# Altium PCB TS-4900 Yonder Parent.PcbDoc (part 2 of 2)
Units mil, origin at the board's own origin, x right, y up, seen from the top; angles counter-clockwise.
Board outline 3838 x 4094 mil, 4 copper layers (Component Side, Ground Plane, Power Plane, Solder Side), stack 33.234 mil thick; 152 components, 102 nets, 692 pads, 286 vias.
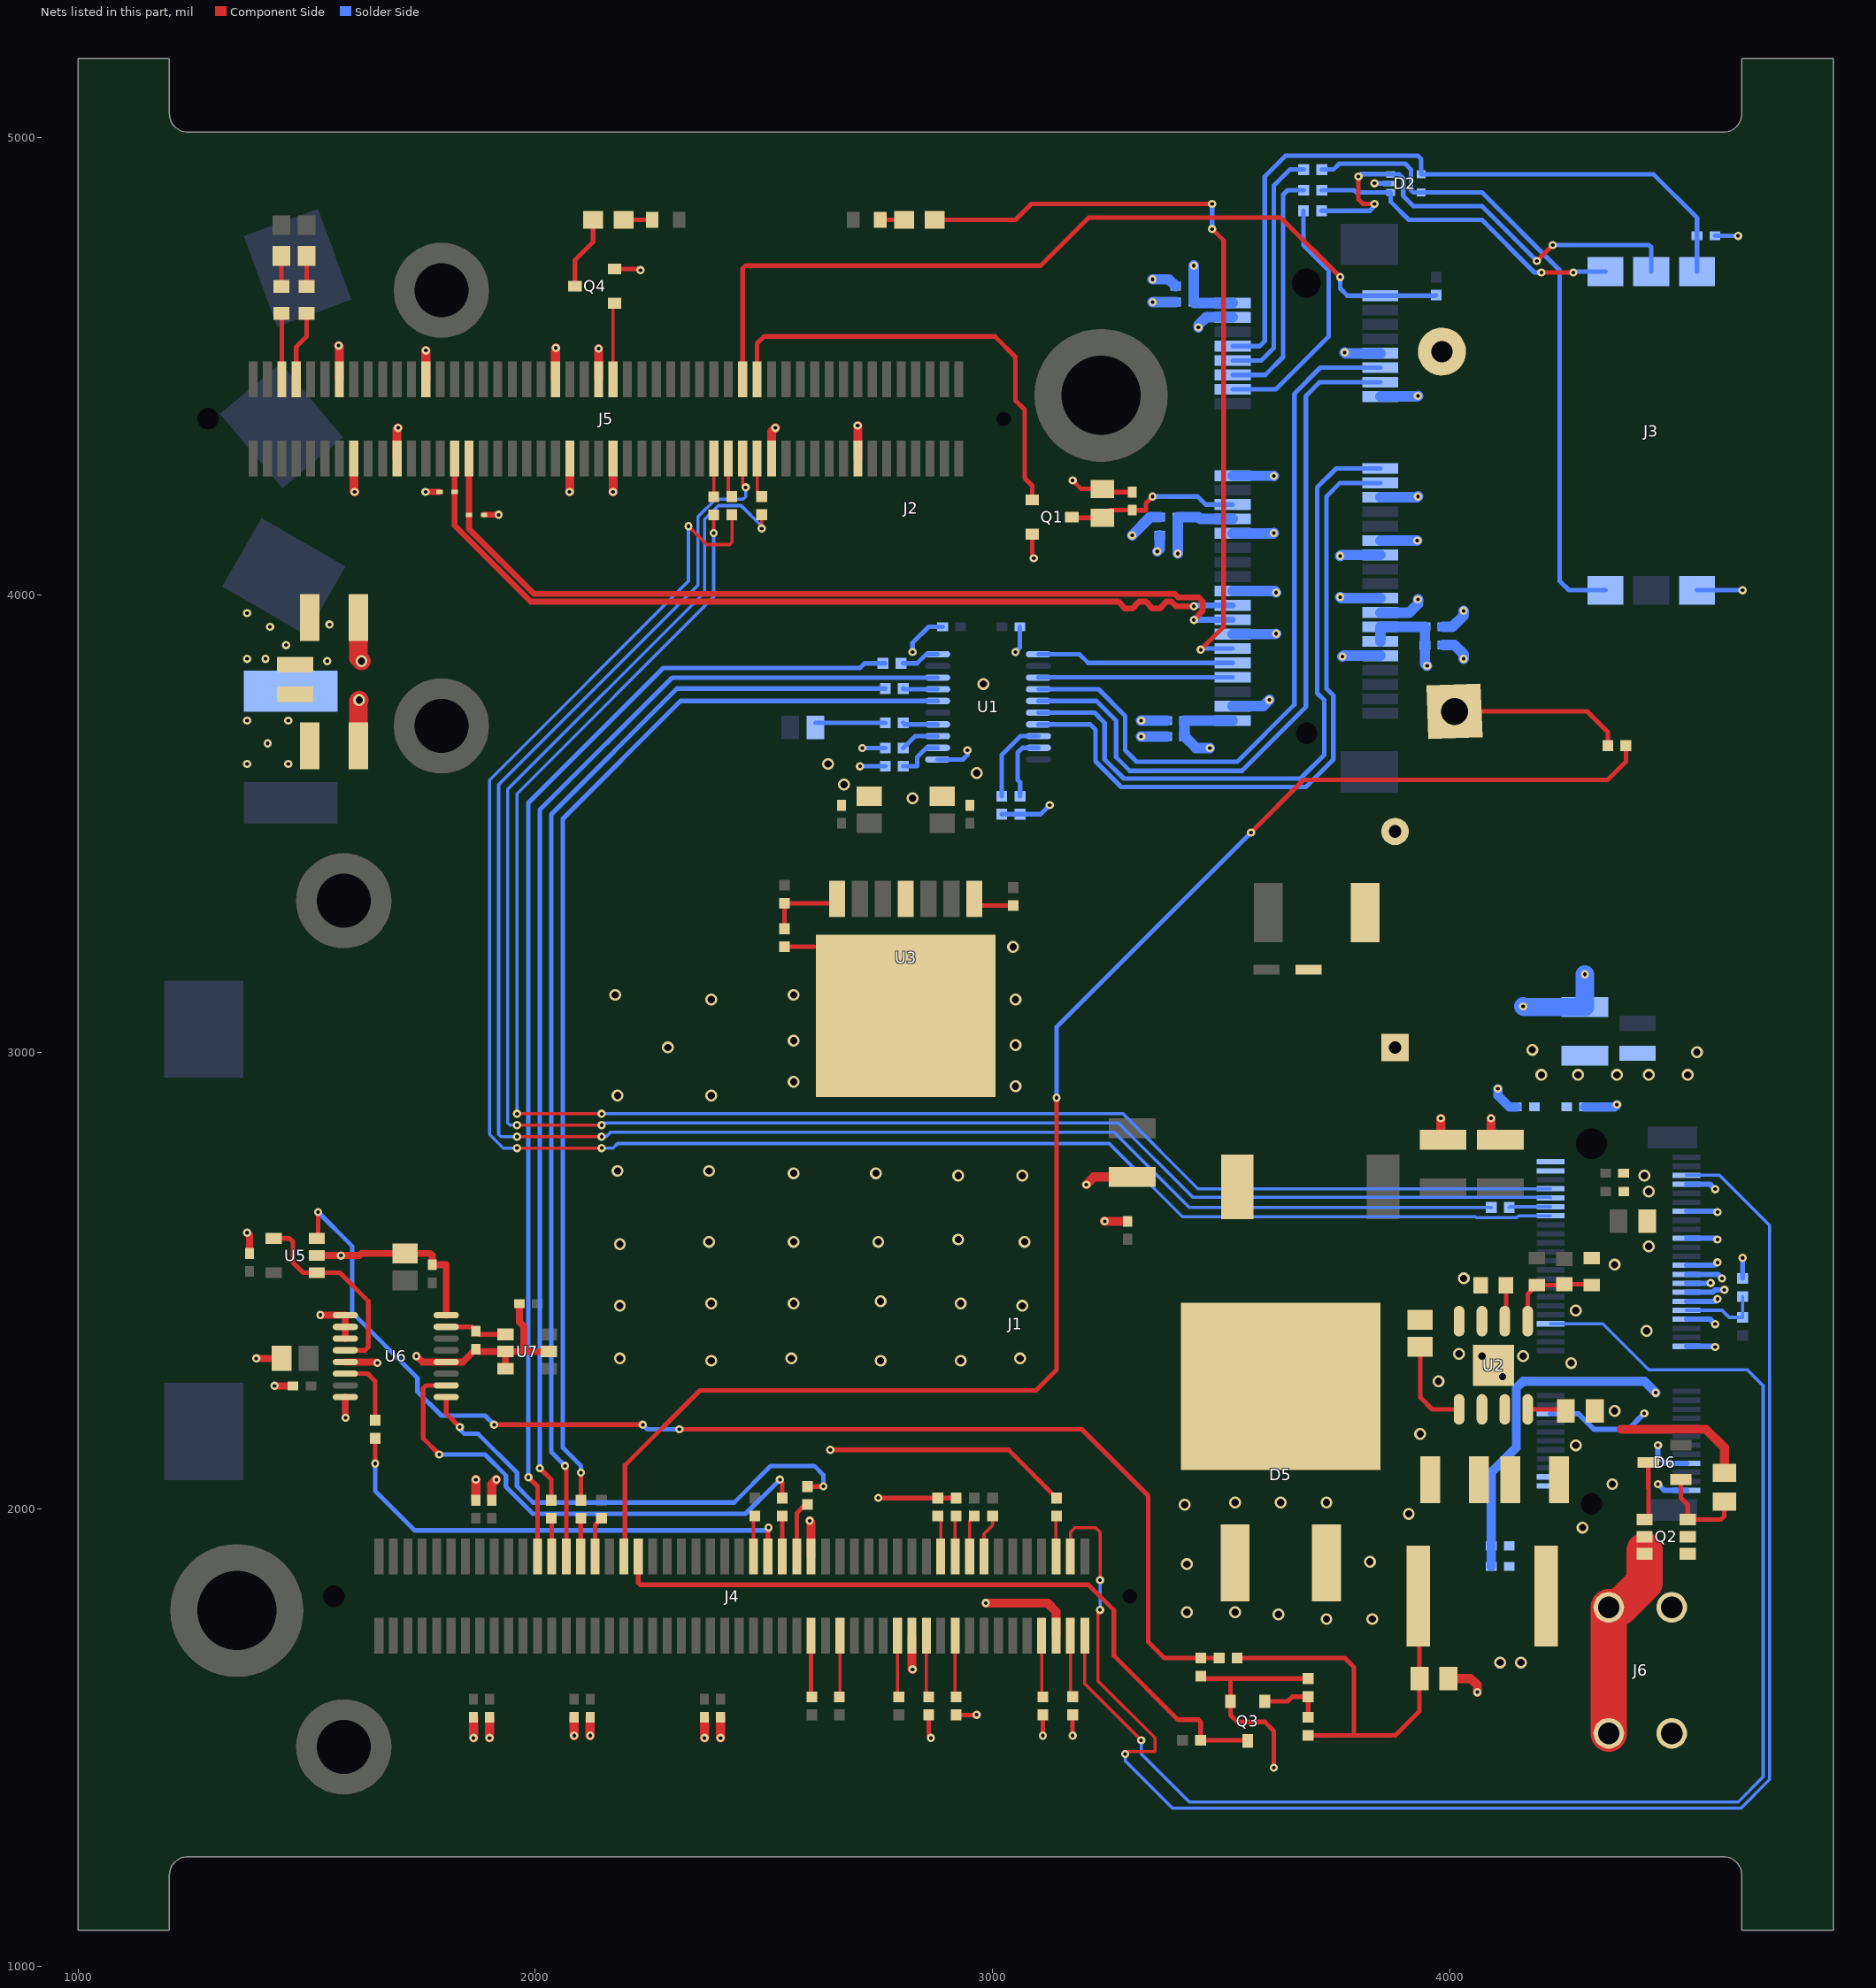
[diagram p4: the nets of this part, all layers, seen from the top]

## Via types
v1: diameter 18, hole 8, Component Side to Solder Side, 198 vias
v2: diameter 26, hole 16, Component Side to Solder Side, 88 vias

## Nets (pads, with @x,y where several pads share a name; then routed paths per layer and width w, separated by ;. In a path a pad name is that pad's centre, name@x,y a point inside that pad or via, vN(x,y) a via of type N, cw(c..) or ccw(c..) an arc to the next point about the centre after c; other vN are vias at no path point) (continued)
ADC_SPI_MISO: J4.56 R57.2 | length 1077.3
  Component Side w10: v1(1650,2100) R57.2@1650,2155.31 ; J4.56@2508.74,1896.61 2508.74,1958.74 v1(2510,1960)
  Solder Side w10: v1(1650,2100) 1650,2040 1736,1954 2504,1954 v1(2510,1960)
ADC_SPI_MOSI: R53.1 U6.2 | length 1099
  Component Side w10: v1(1790,2120) 1755,2155 1755,2265 1761.02,2271.02 U6.2@1805.24,2271.02 ; v1(2535,2065) 2540,2060 R53.1@2540,2024.68
  Solder Side w10: v1(1790,2120) 1889.7,2120 1936,2073.7 1936,2049 1995,1990 2460,1990 v1(2535,2065)
ADC_SPI_SLK: R54.1 U6.1 | length 1063.2
  Component Side w10: U6.1@1805.24,2245.43 1805.24,2209.76 v1(1835,2180) ; R54.1@2595,2049.68 2629.68,2049.68 v1(2630,2050)
  Solder Side w10: v1(1835,2180) 1835,2175 1845,2165 1875,2165 1960,2080 1960,2050 1995,2015 2435,2015 2515,2095 2610,2095 2630,2075 v1(2630,2050)
GND: BT1.2 C1.1 C2.2 C3.2 C4.2 C5.2 C6.2 C7.2 C8.2 C9.2 C10.2 C11.2 C12.2 C13.2 C14.2 C15.2 C16.1 C17.1 C18.2 C19.2 C20.1 C21.1 C23.1 C24.1 C26.1 C27.1 C28.2 C29.2 C30.2 C31.2 C32.2 C33.2 C34.2 C35.2 C36.2 C37.2 C38.2 C39.2 C40.2 C41.2 C42.2 C43.2 C44.2 C45.2 C46.2 C47.2 C48.2 C49.2 C50.2 D2.2 D3.1 D4.1 D5.1 D5.3 J1.1 J1.7 J1.18 J1.33 J1.39 J1.43 J1.45 J1.47 J1.49 J1.51 J1.57 J1.63 J1.69 J2.4 J2.9 J2.15 J2.18 J2.21 J2.26 J2.27 J2.29 J2.34 J2.35 J2.37 J2.40 J2.43 J2.50 J3.5 J4.62 J4.75 J4.95 J5.14 J5.15 J5.21 J5.26 J5.44 J5.45 J5.50 J5.51 J5.73 J5.85 J6.3 J6.4 Q1.2 Q3.2 Q4.2 R3.1 R10.1 R13.2 R14.1 R15.2 R16.1 R17.1 R19.1 R20.1 R21.1 R22.1 R25.1 R29.1 R42.1 R44.1 R45.2 R47.2 R49.2 R50.1 R51.2 R56.1 U1.11 U2.7 U2.9 U3.4 U3.TAB U5.2 U6.4 U6.8 U6.9 U6.10 U6.11 U6.13 U6.16 U7.2 U7.3 U7.5 | length 9837.5
  Component Side w10: Q4.2@2173.31,4712.4 2227.6,4712.4 v1(2230,4710) ; R25.1@2545,3230.32 2609.68,3230.32 ; v1(2645,2130) 2645.16,2129.84 3034.84,2129.84 R50.1@3140,2024.68 ; v1(2750,2025) 2749.68,2024.68 R42.1@2880,2024.68 R44.1@2920,2024.68 ; R45.2@2860,1550.31 2860,1505 v1(2865,1500) ; R47.2@2920,1550.31 2964.69,1550.31 v1(2965,1550.63) ; Q1.2@3086.69,4132.6 3086.69,4083.31 v1(3090,4080) ; v1(3110,1505) R49.2@3110,1550.31 ; v1(3175,1505) R51.2@3175,1550.63 ; v1(3175,4250) 3193.5,4231.5 R10.1@3240,4231.5 3246.81,4224.69 C7.2@3305,4224.69 ; R56.1@3455,1635.32 3460.63,1629.68 3520.2,1629.68 ; v1(3615,1435) 3615,1515 3595,1535 3535,1535 3520.2,1549.8 Q3.2@3520.2,1580 3520.2,1629.68 ; R29.1@3690,1629.68 3520.2,1629.68
  Component Side w13: v1(1760,4225) D4.1@1790.63,4225 ; D3.1@1888,4175 v1(1920,4175)
  Component Side w15: v1(1370,2605) 1375,2600 C47.2@1375,2559.69 ; v1(1390,2330) C45.2@1445.47,2330 ; v1(1430,2270) C46.2@1470.31,2270 ; U5.2@1522.24,2555 1615,2555 1619.53,2559.53 C49.2@1715,2559.53 1770.47,2559.53 1775,2555 C50.2@1775,2534.69 1775.08,2534.76 1805.24,2534.76 U6.8@1805.24,2424.57 ; v1(1530,2425) 1530.43,2424.57 U6.9@1584.76,2424.57 U6.10@1584.76,2398.98 U6.11@1584.76,2373.39 ; U6.16@1584.76,2245.43 1584.76,2200.24 v1(1585,2200) ; U6.13@1584.76,2322.2 1652.8,2322.2 v1(1655,2320) ; v1(1740,2335) 1752.8,2322.2 U6.4@1805.24,2322.2 1841.89,2322.2 C44.2@1870,2350.31 1875.32,2345 U7.2@1935,2345 ; U7.3@1935,2307.6 U7.2@1935,2345 ; C48.2@1965.31,2450 1965.31,2409.69 1975,2400 1975,2345 ; U7.5@2029.49,2345 1975,2345 ; U7.2@1935,2345 1975,2345
  Component Side w19.6: v1(1570,4545) 1571.73,4543.27 J5.14@1571.73,4471.42 ; J5.15@1603.23,4298.19 1603.23,4226.77 v1(1605,4225) ; J5.21@1697.72,4298.19 1697.72,4362.72 v1(1700,4365) ; J5.26@1760.71,4471.42 v1(1760.71,4534.29) ; J5.44@2044.17,4471.42 2044.17,4539.17 v1(2045,4540) ; v1(2075,4225) 2075.67,4225.67 J5.45@2075.67,4298.19 ; J5.50@2138.66,4471.42 v1(2138.66,4538.66) ; v1(2170,4225) 2170.16,4225.16 J5.51@2170.16,4298.19 ; J5.73@2516.61,4298.19 2516.61,4356.61 v1(2525,4365) ; v1(2600,1975) 2603.23,1971.77 J4.62@2603.23,1896.61 ; v1(2705,4370) 2705.59,4369.41 J5.85@2705.59,4298.19 ; J4.75@2823.7,1723.39 2823.7,1651.3 v1(2825,1650) ; v1(2985,1795) 3120,1795 3138.66,1776.34 J4.95@3138.66,1723.39
  Component Side w20: v1(1865,1500) C36.2@1865,1545.31 ; C43.2@1870,2019.69 v1(1870,2065) ; v1(1900,1500) C40.2@1900,1545.31 ; C39.2@1905,2019.69 1905,2055 v1(1915,2065) ; v1(2085,1505) C41.2@2085,1545.31 ; v1(2120,1505) C37.2@2120,1545.31 ; v1(2370,1500) C42.2@2370,1545.31 ; v1(2405,1500) C38.2@2405,1545.31 ; v1(3205,2710) 3221.85,2726.85 C24.1@3305,2726.85 ; v1(3245,2630) 3245.31,2629.69 C28.2@3295,2629.69 ; v1(3980,2855) 3980,2813.15 C27.1@3985,2808.15 ; R21.1@3996.5,1630 4045,1630 4060,1615 v1(4060,1600) ; v1(4090,2855) 4090,2828.15 C23.1@4110,2808.15 ; 4375,2175 4560,2175 4600,2135 R22.1@4600,2080
  Component Side w40: C16.1@1613.15,3670 1613.15,3768.15 v2(1615,3770) ; C17.1@1613.15,3950 1613.15,3861.85 v2(1620,3855)
  Solder Side w10: v1(2710,3625) R16.1@2765.32,3625 ; v1(2715,3665) R14.1@2765.32,3665 ; v1(2825,3875) 2825,3895 2860,3930 C11.2@2890.63,3930 ; U1.11@2879.76,3639.84 2934.84,3639.84 2945,3650 v1(2945,3660) ; R13.2@3020,3520.31 R15.2@3060,3520.31 3105.31,3520.31 v1(3125,3540) ; v1(3050,3875) 3059.69,3884.69 C10.2@3059.69,3930 ; v1(3835,4900) 3835.32,4899.69 D2.2@3867.05,4899.69 ; J3.5@4540,4010 v1(4640,4010) ; C6.2@4579.69,4785 v1(4630,4785) ; R3.1@4640,2504.68 v1(4640,2550)
  Solder Side w11.8: J1.18@4220,2208.82 4281.18,2208.82 4315,2175 4390,2175 v1(4425,2210) ; v1(4455,2055) 4468.5,2041.5 J1.1@4517.24,2041.5 ; v1(4455,2140) 4455,2116.1 4470.55,2100.55 J1.7@4517.24,2100.55 ; J1.33@4517.24,2356.46 4578.54,2356.46 v1(4580,2355) ; J1.39@4517.24,2415.51 4569.49,2415.51 v1(4580,2405) ; J1.43@4517.24,2454.88 4579.88,2454.88 v1(4585,2460) ; J1.45@4517.24,2474.57 4574.57,2474.57 4580,2480 v1(4600,2480) ; J1.47@4517.24,2494.25 4569.25,2494.25 v1(4570,2495) ; J1.49@4517.24,2513.94 4586.06,2513.94 v1(4595,2505) ; J1.51@4517.24,2533.62 4578.62,2533.62 v1(4585,2540) ; J1.57@4517.24,2592.68 4582.32,2592.68 v1(4585,2590) ; J1.63@4517.24,2651.73 4583.27,2651.73 v1(4585,2650) ; J1.69@4517.24,2710.79 4569.21,2710.79 v1(4580,2700)
  Solder Side w20: C4.2@4090.31,1875 C5.2@4090.31,1920 4090.31,2080.31 4145,2135 4145,2265 4160,2280 4425,2280 v1(4450,2255) ; v1(4105,2920) 4105,2905 4130,2880 C3.2@4145.31,2880 ; C2.2@4294.69,2880 4360,2880 v1(4365,2885)
  Solder Side w23: v1(3305,4130) 3345,4170 C14.2@3365.31,4170 ; v1(3325,3690) C18.2@3380.31,3690 ; v1(3325,3725) C19.2@3380.31,3725 ; v1(3350,4640) C9.2@3400.31,4640 ; v1(3350,4690) 3385.32,4690 C8.2@3400.31,4675 ; v1(3360,4095) 3365.31,4100.31 C15.2@3365.31,4130 ; v1(3450,4585) 3450,4590 3466.89,4606.89 J2.4@3525,4606.89 ; J2.50@3525,3756.5 3591.5,3756.5 v1(3605,3770) ; J2.40@3525,3913.98 3618.98,3913.98 v1(3620,3915) ; J2.34@3525,4008.46 3616.54,4008.46 v1(3620,4005) ; J2.26@3525,4134.45 3614.45,4134.45 v1(3615,4135) ; J2.18@3525,4260.43 3614.57,4260.43 v1(3615,4260) ; v1(3760,3995) 3762.28,3992.72 J2.35@3847.83,3992.72 ; v1(3760,4085) 3762.2,4087.2 J2.29@3847.83,4087.2 ; v1(3765,3865) 3766.73,3866.73 J2.43@3847.83,3866.73 ; v1(3770,4530) 3771.85,4528.15 J2.9@3847.83,4528.15 ; J2.37@3847.83,3961.22 3911.22,3961.22 3930,3980 v1(3930,3990) ; J2.27@3847.83,4118.7 v1(3928.7,4118.7) ; J2.21@3847.83,4213.19 3928.19,4213.19 v1(3930,4215) ; J2.15@3847.83,4433.66 3928.66,4433.66 v1(3930,4435) ; C12.2@3984.69,3890 4010,3890 4030,3870 v1(4030,3860) ; C13.2@3984.69,3930 4005,3930 4030,3955 v1(4030,3965)
  Solder Side w40: v1(4160,3100) 4161.85,3098.15 C1.1@4295,3098.15 v1(4295,3170)
  other v1: 1575,2555
  other v2: 3730,1760 3830,1760 3625,1770 3425,1775 3530,1775 3425,1880 3825,1885 4290,1960 3910,1990 3420,2010 3530,2015 3630,2015 3730,2015 4355,2055 4275,2140 3935,2165 4360,2215 3975,2280 4115,2290 4265,2320 2385,2325 2755,2325 2930,2325 2185,2330 2560,2330 3060,2330 4070,2335 4160,2335 4020,2340 4430,2390 4275,2435 2185,2445 3065,2445 2385,2450 2565,2450 2930,2450 2755,2455 4030,2505 4360,2535 4435,2575 2185,2580 2380,2585 2565,2585 2750,2585 3070,2585 2925,2590 4435,2695 2925,2730 3065,2730 4425,2730 2565,2735 2745,2735 2180,2740 2380,2740 2180,2905 2385,2905 3050,2925 2565,2935 2290,3010 3050,3015 2565,3025 2385,3115 3050,3115 2175,3125 2565,3125 3045,3230 2825,3555 2675,3585 2965,3610 2640,3630 2980,3805
GPS_1PPS: J1.38 J4.99 | length 3111.9
  Component Side w7: J4.99@3201.65,1723.39 3201.65,1618.35 v1(3325,1495)
  Solder Side w7: v1(3325,1495) 3325,1465 3430,1360 4630,1360 4685,1415 4685,2270 4650,2305 4435,2305 4334.33,2405.67 J1.38@4220,2405.67
HEARTBEAT: J5.52 Q4.1 | length 167.5
  Component Side w7: J5.52@2170.16,4471.42 2170.16,4634.45 Q4.1@2173.31,4637.6
L\O\R\A\_\C\S\: J1.68 R31.2 | length 3816.1
  Component Side w7: v1(1960,2865) v1(2145,2865) ; v1(2390,4135) R31.2@2390,4175
  Solder Side w7: v1(1960,2865) 1960,3565 2390,3995 v1(2390,4135) ; v1(2145,2865) 3285,2865 3449.06,2700.94 J1.68@4220,2700.94
LoRa5V: C1.2 C2.1 C3.1 C4.1 C5.1 J1.2 J1.4 J1.72 J1.74 L1.2
  other v2: 4110,1665 4155,1665 4200,2950 4280,2950 4365,2950 4435,2950 4520,2950 4540,3000 4180,3005
LORA_RESET: J1.71 J4.98 | length 3659.7
  Component Side w7: J4.98@3170.16,1896.61 3170.16,1950.16 3180,1960 3225,1960 3235,1950 v1(3235,1845) ; v1(3235,1780) 3230,1775 3230,1625 3355,1500 3355,1470 3295,1470 v1(3290,1465)
  Solder Side w7: v1(3235,1780) v1(3235,1845) ; v1(3290,1465) 3290,1450 3394,1346 4635.8,1346 4699,1409.2 4699,2621 4589.53,2730.47 J1.71@4517.24,2730.47
LORA_SPI_CLK: J1.66 R34.2 | length 4041.5
  Component Side w7: v1(1960,2840) v1(2145,2840) ; v1(2495,4145) R34.2@2495,4175.31
  Solder Side w7: v1(1960,2840) 1945,2840 1940,2845 1940,3575 2370,4005 2370,4165 2400,4195 2450,4195 2495,4150 v1(2495,4145) ; v1(2145,2840) 2150,2845 3275,2845 3437.69,2682.31 4218.95,2682.31 J1.66@4220,2681.26
LORA_SPI_MISO: J5.69 R1.2 | length 3984.4
  Component Side w7: v1(1960,2815) v1(2145,2815) ; J5.69@2453.62,4298.19 2453.62,4241.38 v1(2460,4235)
  Solder Side w7: v1(1960,2815) 1925,2815 1920,2820 1920,3585 2356,4021 2356,4170.8 2394.2,4209 2454,4209 2460,4215 v1(2460,4235) ; v1(2145,2815) 2155,2815 2165,2825 3265,2825 3430,2660 R1.2@4090.31,2660
LORA_SPI_MOSI: J1.62 R33.2 | length 4089.7
  Component Side w7: v1(1960,2790) v1(2145,2790) ; v1(2335,4150) 2375,4110 2425,4110 2430,4115 R33.2@2430,4175.31
  Solder Side w7: v1(1960,2790) 1930,2790 1900,2820 1900,3595 2335,4030 v1(2335,4150) ; v1(2145,2790) 2170,2790 2180,2800 3255,2800 3415,2640 4055,2640 4057.31,2637.69 4145.85,2637.69 4150.05,2641.89 J1.62@4220,2641.89
M\_\R\E\S\E\T\: C7.1 J2.22 Q1.3 R10.2 | length 387.9
  Component Side w10: Q1.3@3173.31,4170 3174.8,4168.5 R10.2@3240,4168.5 3256.81,4185.31 C7.1@3305,4185.31 3305.31,4185 3335,4185 3335,4200 v1(3350,4215)
  Solder Side w10: v1(3350,4215) 3448.31,4215 3465.87,4197.44 J2.22@3525,4197.44
M\_\W\A\K\E\: J2.1 J5.70 R8.1 | length 1890.6
  Component Side w10: J5.70@2453.62,4471.42 2453.62,4713.62 2460,4720 3105,4720 3210,4825 3630,4825 v1(3760,4695)
  Solder Side w10: v1(3760,4695) 3760,4670 3775.87,4654.13 J2.1@3847.83,4654.13 3968.82,4654.13 R8.1@3970,4655.31
M_UART_CTS: J2.11 U1.4 | length 1612.4
  Solder Side w10: U1.4@3100.24,3793.39 3231.61,3793.39 3290,3735 3290,3660 3315,3635 3535,3635 3660,3760 3660,4440 3716.65,4496.65 J2.11@3847.83,4496.65
M_UART_DTR: J2.46 U1.3 | length 425
  Solder Side w10: U1.3@3100.24,3818.98 3100.75,3819.49 J2.46@3525,3819.49
M_UART_RI: J2.44 U1.1 | length 432.7
  Solder Side w10: U1.1@3100.24,3870.16 3189.84,3870.16 3209.02,3850.98 J2.44@3525,3850.98
M_UART_RTS: J2.13 U1.5 | length 1608.2
  Solder Side w10: U1.5@3100.24,3767.8 3227.2,3767.8 3270,3725 3270,3645 3300,3615 3545,3615 3685,3755 3685,4435 3715.16,4465.16 J2.13@3847.83,4465.16
M_UART_RXD: J2.17 U1.6 | length 1499
  Solder Side w10: U1.6@3100.24,3742.2 3222.8,3742.2 3245,3720 3245,3640 3287,3598 3673,3598 3725,3650 3725,3770 3710,3785 3710,4235 3751.18,4276.18 J2.17@3847.83,4276.18
M_UART_TXD: J2.19 U1.7 | length 1478
  Solder Side w10: U1.7@3100.24,3716.61 3213.39,3716.61 3225,3705 3225,3635.96 3280.96,3580 3685,3580 3745,3640 3745,3780 3730,3795 3730,4215 3759.69,4244.69 J2.19@3847.83,4244.69
M_USB_DN: D4.2 J2.36 J5.29 | length 1947.4
  Component Side w13: J5.29@1823.7,4298.19 1823.7,4151.3 1990,3985 3275,3985 3290,3970 3305,3970 3320,3985 3335,3985 3350,3970 3365,3970 3380,3985 ; 3380.48,3985 3380,3985 ; v1(3440,3975) 3400.96,3975 3390.96,3985 3380,3985
  Solder Side w13: v1(3440,3975) 3441.97,3976.97 J2.36@3525,3976.97
M_USB_DP: D3.2 J2.38 J5.31 | length 1958
  Component Side w13: J5.31@1855.2,4298.19 1855.2,4143.84 1997.04,4002 3398,4002 3405.5,3994.5 3450.5,3994.5 3459.5,3985.5 3459.5,3964.5 v1(3440,3945)
  Solder Side w13: v1(3440,3945) 3440.47,3945.47 J2.38@3525,3945.47
M_USIM_CLK: J2.12 R7.2 | length 530.7
  Solder Side w10: J2.12@3525,4480.91 3595.91,4480.91 3635,4520 3635,4875 3645,4885 R7.2@3680.31,4885
M_USIM_DATA: J2.10 R6.2 | length 536.2
  Solder Side w10: J2.10@3525,4512.4 3587.4,4512.4 3615,4540 3615,4895 3650,4930 R6.2@3680.31,4930
M_USIM_RST: J2.14 R5.2 | length 555.7
  Solder Side w10: J2.14@3525,4449.41 3619.41,4449.41 3735,4565 3735,4710 3680,4765 R5.2@3680,4840
M_USIM_VDD: C6.1 D2.4 J2.8 J3.1 | length 1592.3
  Solder Side w10: J2.8@3525,4543.9 3583.9,4543.9 3595,4555 3595,4915 3640,4960 3930,4960 3936.93,4953.07 D2.4@3936.93,4919.37 4445.63,4919.37 4540.31,4824.69 C6.1@4540.31,4785 4540.31,4707.17 J3.1@4540,4706.85
MAIN_POWER_FAIL: J4.38 Q3.3 R27.1 | length 1614.7
  Component Side w10: J4.38@2225.28,1896.61 2225.28,1839.72 2230,1835 3209.7,1835 3265,1779.7 3265,1680 3405,1540 3450,1540 3454.68,1535.32 R27.1@3454.68,1495 3555.98,1495 Q3.3@3557.6,1493.39
Modem3.8V: C8.1 C9.1 C12.1 C13.1 C14.1 C15.1 C17.2 C18.1 C19.1 J2.2 J2.24 J2.39 J2.41 J2.52 L3.2 | length 790.3
  Solder Side w23: v1(3405,4090) 3404.68,4090.32 C15.1@3404.68,4130 C14.1@3404.68,4170 3450,4170 3454.06,4165.94 J2.24@3525,4165.94 ; v1(3440,4720) 3439.68,4719.69 C8.1@3439.68,4675 C9.1@3439.68,4640 3441.3,4638.39 J2.2@3525,4638.39 ; v1(3475,3665) 3444.69,3665 C18.1@3419.68,3690 C19.1@3419.68,3725 J2.52@3525,3725 ; J2.41@3847.83,3898.23 J2.39@3847.83,3929.72 3848.11,3930 C13.1@3945.32,3930 C12.1@3945.32,3890 3945.32,3849.68 v1(3950,3845)
  other v1: 1545,3855 1370,3860 1410,3860 1455,3890 1420,3930 1550,3935 1370,3960
MODEM_CTS: J4.28 R12.1 | length 2481.2
  Component Side w10: v1(2065,2095) 2067.8,2092.2 J4.28@2067.8,1896.61
  Solder Side w10: v1(2065,2095) 2035,2125 2035,3520 2310,3795 R12.1@2765.32,3795
MODEM_DTR: R35.1 U1.18 | length 2510.1
  Component Side w10: v1(2010,2090) 2035,2065 R35.1@2035,2019.68
  Solder Side w10: v1(2010,2090) 2010,3530 2298.98,3818.98 U1.18@2879.76,3818.98
MODEM_RESET: J5.72 Q1.1 | length 996
  Component Side w10: J5.72@2485.12,4471.42 2485.12,4549.88 2500.24,4565 3005,4565 3050,4520 3050,4425 3070,4405 3070,4255 3086.69,4238.31 Q1.1@3086.69,4207.4
MODEM_RI: J4.24 R9.1 | length 2563.2
  Component Side w10: v1(1985,2070) 2004.8,2050.2 J4.24@2004.8,1896.61
  Solder Side w10: v1(1985,2070) 1985,3545 2280,3840 2710,3840 2720,3850 R9.1@2765.32,3850
MODEM_RTS: R32.1 U1.16 | length 2433.4
  Component Side w10: R32.1@2100,2019.68 v1(2100,2080)
  Solder Side w10: v1(2100,2080) 2100,2095 2060,2135 2060,3510 2317.8,3767.8 U1.16@2879.76,3767.8
NetBT1_1: BT1.1 R37.1 | length 383.8
  Component Side w10: BT1.1@4010,3745 4300,3745 4345.31,3699.68 R37.1@4345.31,3670
NetC16_2: C16.2 L2.2 L3.1
  other v1: 1370,3630 1460,3630 1415,3675 1370,3725 1460,3725
NetC22_1: C22.1 D5.4 L4.1 U2.8
NetC22_2: C22.2 U2.1 | length 206.4
  Component Side w10: C22.2@3935,2355.47 3935,2245 3961.46,2218.54 U2.1@4020,2218.54
NetC25_1: C25.1 R18.1 R19.2 U2.5 | length 208.9
  Component Side w10: U2.5@4170,2411.46 4170,2470.47 R18.1@4190,2490.47 4248.03,2490.47 C25.1@4250,2492.44 4308.03,2492.44 R19.2@4310,2490.47
NetC26_2: C26.2 U2.6 | length 79.6
  Component Side w10: U2.6@4120,2411.46 4122.56,2414.02 C26.2@4122.56,2490
NetC35_1: C35.1 D7.2 R26.2
NetC44_1: C44.1 U6.7 U7.1 | length 136.6
  Component Side w10: U6.7@1805.24,2398.98 1860.71,2398.98 C44.1@1870,2389.68 1877.28,2382.4 U7.1@1935,2382.4
NetD1_1: D1.1 R4.2 | length 52
  Component Side w10: R4.2@2754.53,4820 D1.1@2806.54,4820
NetD1_2: D1.2 J2.42 | length 1698.1
  Component Side w10: D1.2@2873.46,4820 3050,4820 3085,4855 v1(3480,4855) ; v1(3455,3880) 3505,3930 3505,4775 v1(3480,4800)
  Solder Side w10: v1(3455,3880) 3457.48,3882.48 J2.42@3525,3882.48 ; v1(3480,4800) v1(3480,4855)
NetD2_1: D2.1 J3.3 R7.1 | length 707.6
  Component Side w10: v1(4200,4705) v1(4270,4705)
  Solder Side w10: R7.1@3719.68,4885 3790,4885 3795.3,4879.7 3869.7,4879.7 D2.1@3870,4880 3870,4860 3910,4820 4070,4820 4185,4705 v1(4200,4705) ; v1(4270,4705) 4271.85,4706.85 J3.3@4340,4706.85
NetD2_3: D2.3 J3.2 R5.1 | length 1027.3
  Component Side w10: v1(3800,4915) 3800,4865 3810,4855 v1(3835,4855) ; v1(4190,4730) v1(4225,4765)
  Solder Side w10: R5.1@3719.37,4840 3825,4840 3835,4850 v1(3835,4855) ; v1(3800,4915) 3805.3,4920.3 3869.07,4920.3 D2.3@3870,4919.37 3889.37,4919.37 3898,4910.74 3898,4872 3920,4850 4070,4850 v1(4190,4730) ; v1(4225,4765) 4435,4765 4440,4760 J3.2@4440,4706.85
NetD2_5: D2.5 J3.7 R6.1 | length 1436.9
  Solder Side w10: R6.1@3719.68,4930 3745,4930 3758,4943 3902,4943 3915,4930 3915,4885 3920,4880 D2.5@3936.93,4880 4070,4880 4240,4710 4240,4030 4260,4010 J3.7@4340,4010
NetD6_1: D6.1 Q2.3 R22.2 | length 209.2
  Component Side w10: D6.1@4505,2065.2 4505,2025 4520,2010 Q2.3@4520,1977.4 4592.4,1977.4 4600,1985 R22.2@4600,2017.01
NetD6_3: D6.3 F1.1 Q2.4 | length 128.9
  Component Side w10: Q2.4@4425.51,1977.4 4434.13,1986.02 4434.13,2046.17 4434,2046.3 4434,2102.46 D6.3@4434.13,2102.6
NetD8_1: D8.1 R30.2 | length 62
  Component Side w10: D8.1@2193.46,4820 R30.2@2255.47,4820
NetD8_2: D8.2 Q4.3 | length 161.5
  Component Side w10: Q4.3@2086.69,4675 2086.69,4731.69 2126.54,4771.54 D8.2@2126.54,4820
NetD9_1: D9.1 R11.1 | length 152.8
  Solder Side w10: D9.1@2612.56,3720 R11.1@2765.32,3720
NetD10_2: D10.2 R38.2 | length 67
  Component Side w10: R38.2@1445,4674.53 D10.2@1445,4741.54
NetD11_2: D11.2 R39.2 | length 67
  Component Side w10: R39.2@1500,4674.53 D11.2@1500,4741.54
NetJ1_64: J1.64 R1.1 | length 91
  Solder Side w7: R1.1@4129.69,2660 4131.26,2661.57 J1.64@4220,2661.57
NetJ4_26: J4.26 R35.2 | length 84.2
  Component Side w10: R35.2@2035,1980.31 2036.3,1979.02 J4.26@2036.3,1896.61
NetJ4_30: J4.30 R32.2 | length 84
  Component Side w10: J4.30@2099.29,1896.61 2099.29,1979.61 R32.2@2100,1980.31
NetJ4_32: J4.32 R36.2 | length 89.6
  Component Side w10: J4.32@2130.79,1896.61 2130.79,1966.1 R36.2@2145,1980.31
NetJ4_54: J4.54 R40.2 | length 89.8
  Component Side w7: J4.54@2477.24,1896.61 2477.24,1982.56 R40.2@2480,1985.31
NetJ4_58: J4.58 R53.2 | length 88.8
  Component Side w10: R53.2@2540,1985.31 2540.24,1985.08 J4.58@2540.24,1896.61
NetJ4_60: J4.60 R54.2 | length 126.1
  Component Side w10: J4.60@2571.73,1896.61 2571.73,1991.73 2590.31,2010.31 R54.2@2595,2010.31
NetJ4_61: J4.61 R52.1 | length 134.4
  Component Side w10: J4.61@2603.23,1723.39 2603.23,1591.46 R52.1@2605,1589.68
NetJ4_65: J4.65 R41.1 | length 134.2
  Component Side w7: R41.1@2665,1589.68 2666.22,1590.91 J4.65@2666.22,1723.39
NetJ4_73: J4.73 R43.1 | length 134.9
  Component Side w7: J4.73@2792.2,1723.39 2792.2,1592.48 R43.1@2795,1589.68
NetJ4_77: J4.77 R45.1 | length 135.7
  Component Side w7: J4.77@2855.2,1723.39 2855.2,1594.49 R45.1@2860,1589.68
NetJ4_80: J4.80 R42.2 | length 91.5
  Component Side w7: R42.2@2880,1985.31 2886.69,1978.62 J4.80@2886.69,1896.61
NetJ4_81: J4.81 R47.1 | length 134.5
  Component Side w7: J4.81@2918.19,1723.39 2918.19,1591.5 R47.1@2920,1589.68
NetJ4_82: J4.82 R44.2 | length 89.5
  Component Side w7: J4.82@2918.19,1896.61 2918.19,1983.5 R44.2@2920,1985.31
NetJ4_84: J4.84 R46.2 | length 93
  Component Side w7: J4.84@2949.68,1896.61 2949.68,1975 R46.2@2960,1985.31
NetJ4_86: J4.86 R48.2 | length 96.5
  Component Side w7: J4.86@2981.18,1896.61 2981.18,1946.18 3000,1965 R48.2@3000,1985.31
NetJ4_93: J4.93 R49.1 | length 134.9
  Component Side w7: J4.93@3107.17,1723.39 3107.17,1592.52 R49.1@3110,1589.68
NetJ4_96: J4.96 R50.2 | length 89.3
  Component Side w7: J4.96@3138.66,1896.61 3138.66,1983.98 R50.2@3140,1985.31
NetJ4_97: J4.97 R51.1 | length 135.4
  Component Side w7: J4.97@3170.16,1723.39 3170.16,1594.84 R51.1@3175,1590
NetJ5_6: J5.6 R38.1 | length 144.4
  Component Side w10: R38.1@1445,4615.47 1445.75,4614.72 J5.6@1445.75,4471.42
NetJ5_8: J5.8 R39.1 | length 153.5
  Component Side w10: J5.8@1477.24,4471.42 1477.24,4542.24 1500,4565 R39.1@1500,4615.47
NetJ5_65: J5.65 R31.1 | length 84.1
  Component Side w7: R31.1@2390,4214.37 2390.63,4215 J5.65@2390.63,4298.19
NetJ5_67: J5.67 R33.1 | length 86.8
  Component Side w7: J5.67@2422.13,4298.19 2422.13,4222.56 R33.1@2430,4214.69
NetJ5_71: J5.71 R34.1 | length 87.6
  Component Side w7: J5.71@2485.12,4298.19 2485.12,4224.57 R34.1@2495,4214.69
NetQ3_1: Q3.1 R28.1 R29.2 | length 144.6
  Component Side w10: Q3.1@3595,1580 3645,1580 3655.31,1590.31 R29.2@3690,1590.31 R28.1@3690,1545
NetR9_2: R9.2 U1.20 | length 83.4
  Solder Side w10: R9.2@2804.69,3850 2834.68,3850 2854.84,3870.16 U1.20@2879.76,3870.16
NetR11_2: R11.2 U1.14 | length 76.5
  Solder Side w10: R11.2@2804.69,3720 2808.07,3716.61 U1.14@2879.76,3716.61
NetR12_2: R12.2 U1.17 | length 75.7
  Solder Side w10: R12.2@2804.69,3795 2806.3,3793.39 U1.17@2879.76,3793.39
NetR13_1: R13.1 U1.8 | length 187.5
  Solder Side w10: R13.1@3020,3559.68 3020,3650 3061.02,3691.02 U1.8@3100.24,3691.02
NetR14_2: R14.2 U1.13 | length 85.9
  Solder Side w10: R14.2@2804.69,3665 2830.71,3691.02 U1.13@2879.76,3691.02
NetR15_1: R15.1 U1.9 | length 146.9
  Solder Side w10: R15.1@3060,3559.68 3060,3590 3055,3595 3055,3655 3065.43,3665.43 U1.9@3100.24,3665.43
NetR16_2: R16.2 U1.12 | length 103.5
  Solder Side w10: R16.2@2804.69,3625 2835,3625 2835,3645 2855.43,3665.43 U1.12@2879.76,3665.43
NetR17_2: R17.2 U2.4 | length 85
  Component Side w10: U2.4@4170,2218.54 4249.96,2218.54 R17.2@4253.5,2215
NetR23_1: R23.1 R25.2 U3.7 | length 174.6
  Component Side w10: R25.2@2545,3269.69 R23.1@2545,3325.32 2650.31,3325.31 U3.7@2660,3335
NetR24_1: R24.1 U3.1 | length 91.1
  Component Side w10: U3.1@2960,3335 2974.68,3320.32 R24.1@3045,3320.32
NetR55_1: R55.1 R56.2 U5.3 | length 2723.1
  Component Side w10: U5.3@1522.24,2592.4 1525,2595.16 v1(1525,2650) ; v1(1910,2185) v1(2235,2185) ; v1(2315,2175) 3195,2175 3340,2030 3340,1710 3375.31,1674.69 R56.2@3455,1674.69 3455.31,1675 R55.1@3495.32,1675
  Solder Side w10: v1(1525,2650) 1600,2575 1600,2430 1742.5,2287.5 1742.5,2257.5 1795,2205 1890,2205 v1(1910,2185) ; v1(2235,2185) 2245,2175 v1(2315,2175)
NetR57_1: R57.1 U6.14 | length 157.4
  Component Side w10: U6.14@1584.76,2296.61 1633.39,2296.61 1650,2280 R57.1@1650,2194.68
NetU5_1: U5.1 U5.4 U6.12 | length 443.7
  Component Side w10: U5.4@1427.76,2592.4 1462.6,2592.4 1470,2585 1470,2540 1492.4,2517.6 U5.1@1522.24,2517.6 1572.4,2517.6 1635,2455 1635,2355 1627.8,2347.8 U6.12@1584.76,2347.8
PVin: C20.2 C21.2 F1.2 R21.2 R28.2 R55.2 U2.2 U2.3 | length 931.1
  Component Side w10: R55.2@3534.69,1675 3770,1675 3790,1655 3790,1505.63 ; R28.2@3690,1505.63 3790,1505.63 ; F1.2@3930.47,1810 3933.5,1806.97 R21.2@3933.5,1630 3933.5,1558.5 3880.63,1505.63 3790,1505.63
REGION: J1.41 R2.1 R3.2 | length 174.8
  Solder Side w7: J1.41@4517.24,2435.2 4594.8,2435.2 4610.31,2419.68 R2.1@4640,2419.68 R3.2@4640,2465.31
Vbat: J4.36 R37.2 | length 3501
  Component Side w10: J4.36@2193.78,1896.61 2196,1898.83 2196,2096 2360,2260 3095,2260 3140,2305 v1(3140,2900) ; v1(3565,3480) 3680,3595 4345,3595 4384.69,3634.69 R37.2@4384.69,3670
  Solder Side w10: v1(3140,2900) 3140,3055 v1(3565,3480)
Vin: J6.1 J6.2 Q2.1 Q2.2 Q2.5 Q2.6 | length 446.5
  Component Side w80: J6.2@4347.2,1510 J6.1@4347.2,1785.59 4371.21,1785.59 4425.51,1839.9 Q2.6@4425.51,1910
pads on no net: D6.2 H1.MH H2.MH H3.MP H4.MP H5.MH H6.MH H7.MP H8.MP H9.MP H13.1 H14.1 J1.3 J1.5 J1.6 J1.8 J1.9 J1.10 J1.11 J1.12 J1.13 J1.14 J1.15 J1.16 J1.17 J1.19 J1.20 J1.21 J1.22 J1.23 J1.32 J1.34 J1.35 J1.36 J1.37 J1.40 J1.42 J1.44 J1.46 J1.48 J1.50 J1.52 J1.53 J1.54 J1.55 J1.56 J1.58 J1.59 J1.60 J1.61 J1.65 J1.67 J1.70 J1.73 J1.75 J1.MH1 J1.MH2 J1.MP1 J1.MP2 J2.3 J2.5 J2.6 J2.7 J2.16 J2.20 J2.23 J2.25 J2.28 J2.30 J2.31 J2.32 J2.33 J2.45 J2.47 J2.48 J2.49 J2.51 J2.MH1 J2.MH2 J2.MP1 J2.MP2 J3.6 J4.1 J4.2 J4.3 J4.4 J4.5 J4.6 J4.7 J4.8 J4.9 J4.10 J4.11 J4.13 J4.14 J4.17 J4.18 J4.19 J4.20 J4.21 J4.22 J4.23 J4.25 J4.27 J4.31 J4.33 J4.35 J4.37 J4.39 J4.40 J4.41 J4.42 J4.43 J4.44 J4.45 J4.46 J4.48 J4.49 J4.50 J4.51 J4.52 J4.53 J4.55 J4.57 J4.59 J4.63 J4.64 J4.66 J4.67 J4.68 J4.69 J4.70 J4.71 J4.72 J4.74 J4.76 J4.78 J4.79 J4.83 J4.85 J4.87 J4.88 J4.89 J4.90 J4.91 J4.92 J4.94 J4.100 J4.MH1 J4.MH2 J5.1 J5.2 J5.3 J5.4 J5.5 J5.7 J5.9 J5.10 J5.11 J5.12 J5.16 J5.17 J5.18 J5.19 J5.20 J5.22 J5.23 J5.24 J5.25 J5.27 J5.28 J5.30 J5.32 J5.33 J5.34 J5.35 J5.36 J5.37 J5.38 J5.40 J5.41 J5.42 J5.43 J5.46 J5.47 J5.48 J5.49 J5.53 J5.54 J5.55 J5.56 J5.57 J5.58 J5.59 J5.60 J5.61 J5.62 J5.64 J5.66 J5.68 J5.74 J5.75 J5.76 J5.77 J5.78 J5.80 J5.81 J5.82 J5.83 J5.84 J5.86 J5.87 J5.88 J5.89 J5.90 J5.91 J5.92 J5.93 J5.94 J5.95 J5.96 J5.97 J5.98 J5.99 J5.100 J5.MH1 J5.MH2 U4.MGL U4.MGR U4.MH

## Polygon pours and split planes (outlines as drawn)
GND on Component Side "GND_L01_P010" (solid, pour order 10): 4370,2755 4370,2680 4395,2680 4410,2665 4410,2580 4295,2580 4290,2575 4290,2520 4340,2520 4340,2465 4200,2465 4195,2460 4195,2380 4185,2370 4095,2370 4095,2525 3980,2525 4050,2455 4050,2375 4040,2365 3975,2365 3975,2330 3970,2325 3950,2325 3950,2255 3970,2235 3995,2235 3995,2255 4005,2265 4275,2265 4285,2255 4285,2180 4280,2175 4205,2175 4175,2145 4175,1945 4300,1945 4395,2040 4395,2250 4460,2315 4460,2755
NetD6_3 on Component Side "NETD6_3_L01_P000" (solid, pour order 0): 4180,1695 4295,1695 4295,1815 4320,1840 4350,1840 4375,1865 4375,1935 4400,1960 4450,1960 4450,2000 4380,2000 4305,1925 4180,1925
PVin on Component Side "PVIN_L01_P002" (solid, pour order 2): 4055,2255 4135,2255 4135,2165 4160,2140 4160,1995 4150,1985 4085,1985 3980,1880 3980,1690 3890,1690 3890,1920 3915,1945 3960,1945 4010,1995 4010,2110 4055,2155
NetC22_1 on Component Side "NETC22_1_L01_P004" (solid, pour order 4): 3980,2385 3990,2375 4035,2375 4040,2380 4040,2450 3975,2515 3720,2515 3665,2570 3665,2810 3445,2810 3395,2760 3395,2060 3875,2060 3875,2380 3880,2385
5V on Component Side "5V_L01_P006" (solid, pour order 6): 3690,2810 3690,2580 3735,2535 4135,2535 4150,2520 4280,2520 4280,2585 4285,2590 4395,2590 4400,2595 4400,2660 4390,2670 4360,2670 4360,2755 4275,2755 4255,2735 3930,2735 3920,2745 3920,2800 3910,2810
GND on Component Side "GND_L01_P008" (solid, pour order 8): 3890,2280 3915,2280 3915,2240 3980,2175 4040,2175 4040,2165 3995,2120 3995,2005 3950,1960 3905,1960 3870,1925 3870,1720 3395,1720 3395,2040 3890,2040
5V on Component Side "5V_L01_P012" (solid, pour order 12): 2840,3285 2840,3480 2855,3495 3510,3495 3620,3385 3620,3135 3910,2845 3910,2810 3690,2810 3690,2830 3255,2830 3115,2970 3115,3365 3090,3390 2945,3390 2935,3380 2935,3285
NetC35_1 on Component Side "NETC35_1_L01_P014" (solid, pour order 14): 3670,3380 3670,3140 3850,2960 3940,2960 3955,2975 3955,3380
3.8V on Component Side "3.8V_L01_P016" (solid, pour order 16): 2780,3285 2780,3480 2765,3495 1985,3495 1880,3600 1610,3600 1610,3485 1775,3485 1870,3390 2680,3390 2690,3380 2690,3285
GND on Component Side "GND_L01_P020" (solid, pour order 20): 2790,3405 2790,3275 2580,3275 2580,3150 2150,3150 2145,3145 2145,2305 2165,2285 3070,2285 3110,2325 3110,2940 3085,2965 3085,3275 2830,3275 2830,3405
GND on Component Side "GND_L01_P022" (solid, pour order 22): 2790,3395 2790,3530 2640,3530 2600,3570 2600,3890 3140,3890 3140,3615 3055,3530 2830,3530 2830,3395
GND on Ground Plane (split plane): 310 vertices, not listed, extent 1020.1,1099.1 4817.9,5152.9
Modem3.8V on Power Plane (split plane): 4817.9,3490.01 3335.69,3490.01 3115.35,3710.35 3113.78,3711.55 3113.03,3711.86 3111.96,3712.31 3110,3712.56 1020.1,3712.56 1020.1,5152.9 1179.9,5152.9 1179.9,5052 1179.91,5051.95 1180.28,5045.27 1181.41,5038.63 1183.28,5032.15 1185.86,5025.93 1189.12,5020.03 1193.02,5014.53 1197.51,5009.51 1202.53,5005.02 1208.03,5001.12 1213.93,4997.86 1220.15,4995.28 1226.63,4993.41 1233.27,4992.28 1239.95,4991.91 1240,4991.9 4598,4991.9 4598.05,4991.91 4604.73,4992.28 4611.37,4993.41 4617.85,4995.28 4624.07,4997.86 4629.97,5001.12 4635.47,5005.02 4640.49,5009.51 4644.98,5014.53 4648.88,5020.03 4652.14,5025.93 4654.72,5032.15 4656.59,5038.63 4657.72,5045.27 4658.09,5051.95 4658.1,5052 4658.1,5152.9 4817.9,5152.9
LoRa5V on Power Plane (split plane): 4817.9,1099.1 4658.1,1099.1 4658.1,1200 4658.09,1200.05 4657.72,1206.73 4656.59,1213.37 4654.72,1219.85 4652.14,1226.07 4648.88,1231.97 4644.98,1237.47 4640.49,1242.49 4635.47,1246.98 4629.97,1250.88 4624.07,1254.14 4617.85,1256.72 4611.37,1258.59 4604.73,1259.72 4598.05,1260.09 4598,1260.1 4007.56,1260.1 4007.56,2956.87 4073.13,3022.44 4817.9,3022.44
5V on Power Plane (split plane): 3327.21,3477.09 3328.78,3475.89 3330.6,3475.13 3332.56,3474.88 4817.9,3474.88 4817.9,3037.56 4070,3037.56 4068.04,3037.31 4066.22,3036.55 4064.65,3035.35 3994.65,2965.35 3993.45,2963.78 3993.14,2963.03 3992.69,2961.96 3992.44,2960 3992.44,1260.1 1240,1260.1 1239.95,1260.09 1233.27,1259.72 1226.63,1258.59 1220.15,1256.72 1213.93,1254.14 1208.03,1250.88 1202.53,1246.98 1197.51,1242.49 1193.02,1237.47 1189.12,1231.97 1185.86,1226.07 1183.28,1219.85 1181.41,1213.37 1180.28,1206.73 1179.91,1200.05 1179.9,1200 1179.9,1099.1 1020.1,1099.1 1020.1,3697.44 3106.87,3697.44

## Other copper
Component Side:
  rectangle net Vin: 4410,1890 4545,1950
  rectangle net NetC16_2: 1350,3610 1540,3810
  rectangle net Modem3.8V: 1350,3820 1565,4005
Solder Side:
  rectangle net 3.8V: 1350,3485 1730,3600
  rectangle net LoRa5V: 4155,2920 4570,3030
  rectangle net LoRa5V: 4190,2735 4255,2930
  rectangle net LoRa5V: 4130,1785 4255,2075
  rectangle net LoRa5V: 4080,1635 4255,1795
  rectangle net NetC16_2: 1350,3610 1520,3840
Ground Plane (plane layer: these items are gaps in the copper):
  lines w15: 3237.09,5009.91 3237.09,4435.98 3237.09,4067.09 3480,4067.09 3580,4067.09 3580,3890 3480,3890 1965,3890 1810,4045 1570,4045 1570,2620 2015,2175 2655,2175 3160,1670 3325,1505 4350,1505 ; 3677.5,3107.5 3905,2880 4185,2880 4265.63,2799.37 4410.63,2799.37 4460,2750 4460,2315 4395,2250 4395,2070 4570,1895 4570,1790 ; 4347.2,1785.59 4347.2,1762.2 4305,1720 3415,1720 3375,1760 3375,2805 3980,3410 4838,3410
Power Plane (plane layer: these items are gaps in the copper):
  lines w15: 1000,3705 3110,3705 3332.56,3482.44 4835.56,3482.44 ; 4000,1240 4000,2960 4070,3030 4838,3030

## Silkscreen, mask and mechanical layers (free items; w line width, h text height)
Top Overlay:
  text "HEARTBEAT" at 2325,4915 h60 r180
  text "CELL STATUS" at 3005,4915 h60 r180
  text "Latium Technologies" at 4780,4840 h150 r180
  text "CR2032 Coin Cell (+ UP)" at 4550,3845 h60 r90
  text "TS-4900 Yonder Parent Rev D" at 4775,3410 h100 r90
  text "TS-4900 SBC" at 1285,2365 h60 r90
  text "GND" at 4680,1450 h150 r90
  text "a" at 4695,1440 h150 r180
  text "Vin" at 3925,1365 h150
  text "a" at 4130,1345 h150
  text "Made in Canada" at 1730,1330 h100
  text "02/2020" at 2480,1330 h100
  text "Vin: 8 - 38VDC" at 3670,1285 h100
Bottom Overlay:
  text "PCIe CELL MODEM" at 1780,4380 h60 r90
  text "SIM" at 4475,3685 h60
  text "RG191-M2 LoRa Concentrator" at 1600,2915 h60 r90
Mechanical 1:
  the board outline again, w8